# Altium PCB main1.PcbDoc
Units mm, origin at the board's own origin, x right, y up, seen from the top; angles counter-clockwise.
Board outline 133.25 x 160.58 mm, 2 copper layers (Top Layer, Bottom Layer); 75 components, 60 nets, 284 pads, 231 vias.
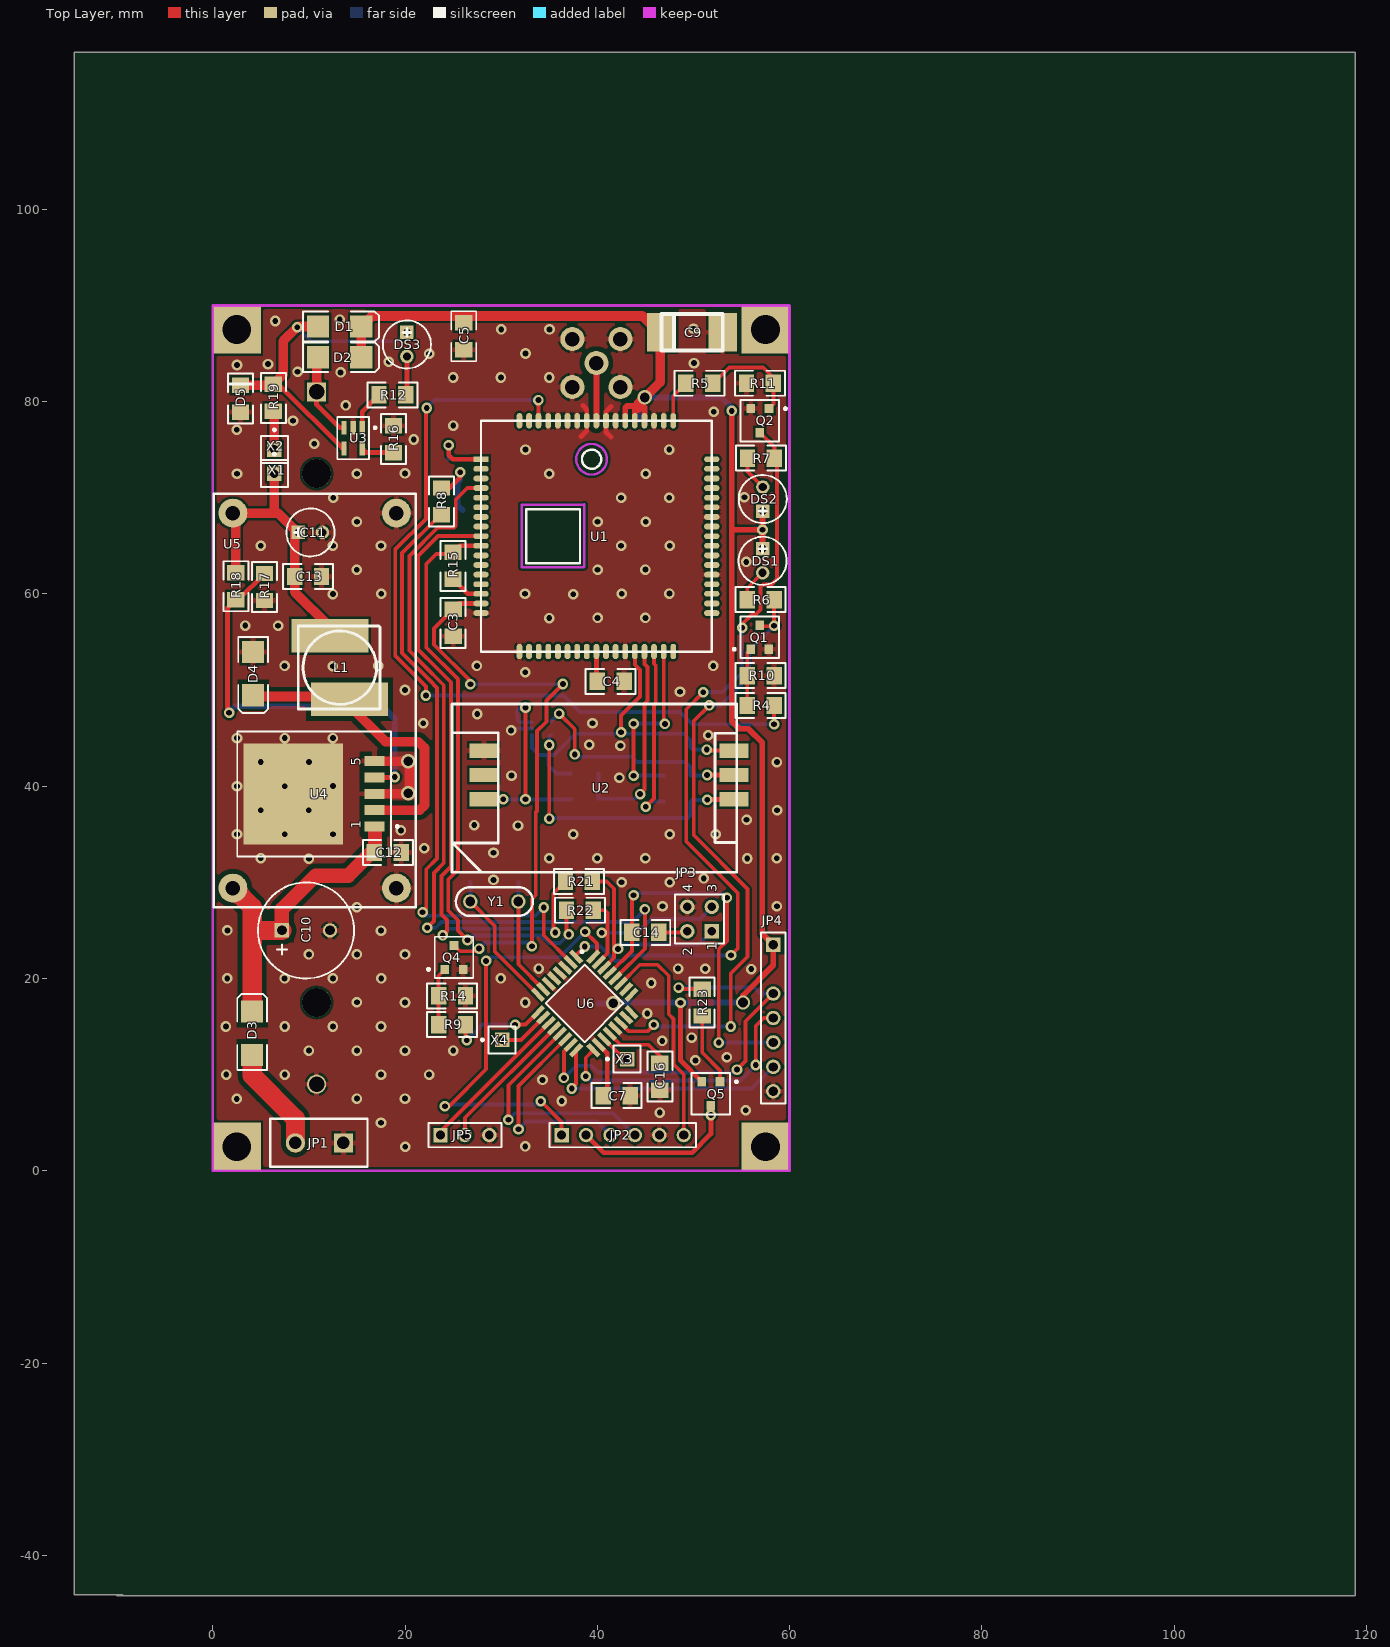
[diagram p0: Top Layer view]
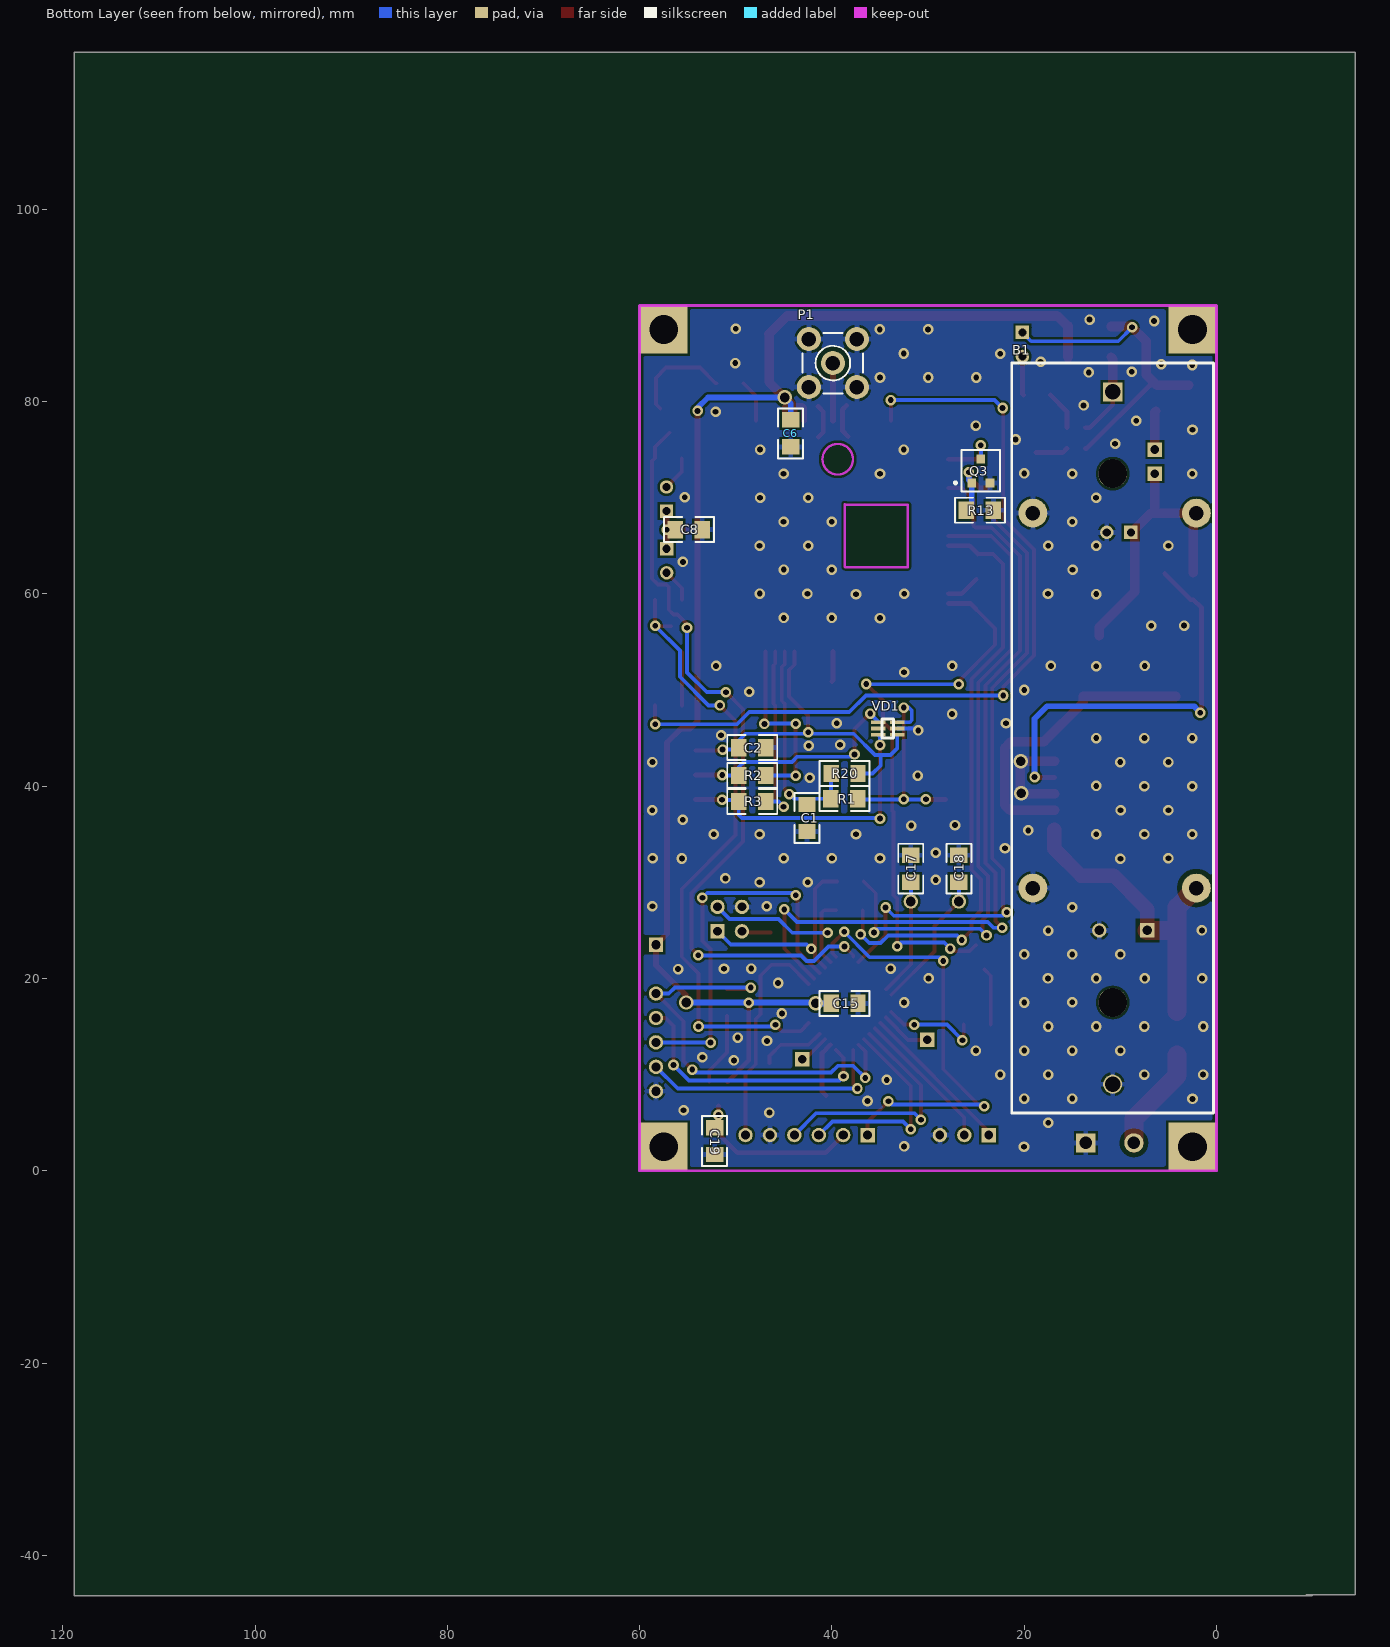
[diagram p1: Bottom Layer view, seen from below]

## Layer stack, top to bottom
Top Layer: signal copper 0.0356
Dielectric: dielectric 0.32, FR-4, Dk 4.8
Bottom Layer: signal copper 0.0356

## Board outline
-9.975,-44.225 118.825,-44.225 118.825,116.35 -14.425,116.35 -14.425,-44.1 -9.35,-44.1

## Design rules (kind name [scope] priority, off if disabled: settings)
Clearance Clearance_3 [InPoly vs InNet('NetD3_1') or
InNet('NetC10_1') or
InNet('NetD4_2')] p1: gap=0.5
Clearance Clearance_2 [InComponent(U4) vs InPoly] p2: gap=0.5
Clearance [InNet('NetP1_1') vs InPoly] p3: gap=0.5
Clearance Clearance_1 [All] p4: gap=0.25
ComponentClearance [All] p1: gap=0.254 collisioncheckmode=0
HoleSize [All] p1: absolutevalues=TRUE maxlimit=4 minlimit=0.025 maxpercent=80.000 minpercent=20.000
PolygonConnect PolygonConnect_1 [HasPad('U4-6')] p1: connectstyle=Direct reliefconductorwidth=0.254 reliefentries=4 polygonreliefangle="90 Angle"
PolygonConnect [All] p2: connectstyle=Relief reliefconductorwidth=0.5 reliefentries=4 polygonreliefangle="90 Angle"
RoutingLayers [All] p1: top layer=Horizontal bottom layer=Vertical
RoutingVias [All] p1: holewidth=0.6 width=1.1 viastyle="Through Hole" minholewidth=0.5 minwidth=1 maxholewidth=1 maxwidth=1.5
SolderMaskExpansion [All] p1: expansion=0.102
TestPointUsage [All] p1: valid=0 allowmultiple=FALSE
Testpoint [All] p1: side=15 testpointundercomponent=TRUE minsize=1.016 maxsize=2.54 preferedsize=1.524 minholesize=0 maxholesize=1.016 preferedholesize=0.813 testpointgrid=0.025 style=1023 order=-539222988
Width [All] p1: maxlimit=3 minlimit=0.2 preferedwidth=0.254 toplayer_prefwidth=0.5 bottomlayer_prefwidth=0.4 minimp=50.000000 maximp=50.000000 favimp=50.000000
15 further rules are at their usual default settings.

## Components (designator, comment, footprint, x,y, rotation, side; value= is the part's Value field where it differs from the comment)
B1 "BAT18650_HOLDER" BAT18650_HOLDER 10.8,45 r270 bottom
C1 "22" _1206 42.6,36.7 r90 bottom
C2 "0.1" _1206 48.3,44 r0 bottom
C3 "0.1" _1206 25,57 r90 top
C4 "10,0" _1206 41.4,50.9 r0 top
C5 "1.0" _1206 26.1,86.8 r90 top
C6 "1.0" _1206 44.3,76.7 r90 bottom
C7 "1.0" _1206 42,7.8 r180 top
C8 "1.0" _1206 54.9,66.675 r0 bottom
C9 "10.0x25 tantal" CAP_EL_6_3 46.7,87.2 r0 top
C10 "" el5 12.2,25 r180 top
C11 "" el3 8.9,66.4 r0 top
C12 "Cap" _1206 18.2,33.1 r180 top
C13 "Cap" _1206 9.9,61.8 r180 top
C14 "0.1" _1206 45,24.8 r0 top
C15 "1.0" _1206 38.7,17.4 r0 bottom
C16 "1.0" _1206 46.5,9.8 r90 top
C17 "10" _1206 31.8,31.4 r270 bottom
C18 "10" _1206 26.8,31.4 r270 bottom
C19 "1.0" _1206 52.2,3.1 r90 bottom
D1 "10BQ100" DSO-C2/X2.3 13.2,87.8 r0 top
D2 "10BQ100" DSO-C2/X2.3 13.2,84.6 r0 top
D3 "10BQ100" DSO-C2/X2.3 4.1,14.3 r90 top
D4 "10BQ100" DSO-C2/X2.3 4.2,51.7 r270 top
D5 "D Zener" _1206d 2.9,80.3 r270 top
DS1 "LED0" el3 57.2,64.7 r270 top
DS2 "LED0" el3 57.2,68.6 r90 top
DS3 "LED0" el3 20.2,87.2 r270 top
JP1 "Header 2" BT5-2 13.6,2.9 r180 top
JP2 "GPSCONN" HDR1X6 36.3,3.719 r0 top
JP3 "Header 2X2" HDR2X2 51.9,24.9 r90 top
JP4 "AVR_conn" AVR_CONN 58.3,23.5 r270 top
JP5 "TOMAINCONN" HDR1X3 23.7,3.7 r0 top
L1 "SDR0805-390KL" L10x10 18.3,57.4 r180 top
P1 "SMB" SMB_V-RJ45 39.9,84 r180 bottom
Q1 "BC847" SO-G3/C2.5 56.9,55.5 r0 top
Q2 "BC847" SO-G3/C2.5 56.9,78 r180 top
Q3 "BC847" SO-G3/C2.5 24.5,72.8 r180 bottom
Q4 "BC847" SO-G3/C2.5 25.1,22.2 r0 top
Q5 "BC807" SO-G3/C2.5 51.8,8 r180 top (schematic designator Q?)
R1 "22R" _1206 38.7,38.7 r180 bottom
R2 "22R" _1206 48.3,41.1 r0 bottom
R3 "22R" _1206 48.3,38.4 r0 bottom
R4 "4K7" _1206 57,48.4 r0 top
R5 "4K7" _1206 50.6,81.9 r180 top
R6 "300" _1206 57,59.4 r0 top
R7 "300" _1206 57,74.1 r180 top
R8 "4K7" _1206 23.8,69.6 r270 top
R9 "4K7" _1206 24.9,15.2 r0 top
R10 "33K" _1206 57,51.5 r0 top
R11 "33K" _1206 56.9,81.9 r180 top
R12 "300" _1206 18.7,80.7 r0 top
R13 "33K" _1206 24.6,68.7 r180 bottom
R14 "33K" _1206 24.9,18.2 r0 top
R15 "10K" _1206 25,62.9 r270 top
R16 "2K0" _1206 18.8,76.1 r90 top
R17 "*" _1206 5.4,60.7 r270 top
R18 "*" _1206 2.4,60.8 r90 top
R19 "1R" _1206 6.3,80.4 r90 top
R20 "4K7" _1206 38.7,41.3 r0 bottom
R21 "1K0" _1206 38.1,30.1 r0 top
R22 "1K0" _1206 38.2,27.1 r0 top
R23 "Res2" _1206 50.9,17.5 r90 top (schematic designator R?)
U1 "SIM900" SIM900F 39.9,66 r0 top
U2 "SIM_HOLDER" SIM_HOLDER_1 39.7,39.8 r270 top
U3 "LTC4054" SO-G5/P.95 14.6,76.2 r180 top
U4 "LM2596S-ADJ" SIP-G5/Y2.1 12.6,39.2 r90 top
U5 "LM2596_MODULE" LM2596_MODULE_1 10.6,48.9 r90 top
U6 "ATmega8" QFP7X7-G32/X.5N 38.7,17.4 r315 top
VD1 "*" sot363 34.2,46 r90 bottom
X1 "Socket" PIN1 6.4,72.5 r0 top
X2 "Socket" PIN1 6.4,75 r0 top
X3 "Socket" PIN1 43.1,11.6 r90 top
X4 "Socket" PIN1 30.1,13.6 r90 top
Y1 "16MGz" qwarz1 31.8,28 r180 top

## Footprints (in the part's own frame and the unit in brackets; to place one, negate y for a bottom-side part, rotate by r counter-clockwise, add the part's x,y. Pads: shape width x height; smd on the part's side, far side on the other; paste and mask are expansions set on the pad)
_1206 [mm]
  rect 1.6x1.8 smd: 1(-1.412,-0.007) 2(1.388,-0.007)
  silkscreen extent -2.61,-1.31 2.59,1.29
_1206d [mm]
  rect 1.6x1.8 smd: 1(1.395,-0.009) 2(-1.405,-0.009)
  silkscreen extent -2.6,-1.31 2.6,1.29
AVR_CONN [mm]
  rect 1.5x1.5 hole 0.95: 1(-0.007,-0.001)
  round 1.5 hole 0.95: 3(5.073,-0.001) 4(7.613,-0.001) 5(10.153,-0.001) 6(12.693,-0.001) 7(15.233,-0.001)
  silkscreen extent -1.28,-1.27 16.5,1.27
BAT18650_HOLDER [mm]
  round 3 hole 3: 0(-27.5,0) 0(27.5,0)
  rect 2x2 hole 1.6: 1(-36,0)
  round 2 hole 1.6: 2(36,0)
  silkscreen extent -39,-10.5 39,10.5
BT5-2 [mm]
  rect 2x2 hole 1.3: 1(0.006,0.008)
  round 2 hole 1.3: 2(5.006,0.008)
  silkscreen extent -2.49,-2.49 7.61,2.51
CAP_EL_6_3 [mm]
  rect 3x4 smd: 1(-0.011,0.006) 2(6.339,0.006)
  silkscreen extent -0.01,-1.9 6.34,1.91
DSO-C2/X2.3 [mm]
  rect 2.3x2.3 smd: 1(-2.252,0.001) 2(2.248,0.001)
  silkscreen extent -3.8,-1.55 4.1,1.55
el3 [mm]
  rect 1.4x1.4 hole 0.85: 1(0.011,-0.008)
  round 1.4 hole 0.85: 2(2.511,-0.008)
  silkscreen extent -1.23,-2.51 3.76,2.49
el5 [mm]
  rect 1.5x1.5 hole 1: 1(5.001,0.007)
  round 1.5 hole 1: 2(0.001,0.007)
  silkscreen extent -2.5,-4.99 7.5,5.01
HDR1X3 [mm]
  rect 1.5x1.5 hole 0.9: 1(-0.009,0.011)
  round 1.5 hole 0.9: 2(2.531,0.011) 3(5.071,0.011)
  silkscreen extent -1.28,-1.26 6.34,1.28
HDR1X6 [mm]
  rect 1.5x1.5 hole 0.95: 1(-0.012,-0.008)
  round 1.5 hole 0.95: 2(2.528,-0.008) 3(5.068,-0.008) 4(7.608,-0.008) 5(10.148,-0.008) 6(12.688,-0.008)
  silkscreen extent -1.28,-1.28 13.96,1.26
HDR2X2 [mm]
  rect 1.5x1.5 hole 0.9: 1(0,0)
  round 1.5 hole 0.9: 2(0,2.54) 3(2.54,0) 4(2.54,2.54)
  silkscreen extent -1.27,-1.27 3.81,3.81
L10x10 [mm]
  rect 8x3.5 smd: 1(4.075,8.372) 2(6.107,1.768)
  silkscreen extent 0.9,0.75 9.41,9.39
LM2596_MODULE_1 [mm]
  round 3 hole 1.5: 1(-19.5,8.5) 2(-19.5,-8.5) 3(19.5,-8.5) 4(19.5,8.5)
  silkscreen extent -21.5,-10.5 21.5,10.5
PIN1 [mm]
  rect 1.5x1.5 hole 0.9: 1(0.012,0.005)
  silkscreen extent -1.39,-1.4 1.41,2.18
QFP7X7-G32/X.5N [mm]
  rect 1.65x0.5 smd: 1(-4.082,2.794) 2(-4.082,1.994) 3(-4.082,1.194) 4(-4.082,0.394) 5(-4.082,-0.406) 6(-4.082,-1.206) 7(-4.082,-2.006) 8(-4.082,-2.806) 17(4.068,-2.806) 18(4.068,-2.006) 19(4.068,-1.206) 20(4.068,-0.406) 21(4.068,0.394) 22(4.068,1.194) 23(4.068,1.994) 24(4.068,2.794)
  rect 0.5x1.65 smd: 9(-2.807,-4.081) 10(-2.007,-4.081) 11(-1.207,-4.081) 12(-0.407,-4.081) 13(0.393,-4.081) 14(1.193,-4.081) 15(1.993,-4.081) 16(2.793,-4.081) 25(2.793,4.069) 26(1.993,4.069) 27(1.193,4.069) 28(0.393,4.069) 29(-0.407,4.069) 30(-1.207,4.069) 31(-2.007,4.069) 32(-2.807,4.069)
  silkscreen extent -4.13,-2.86 2.84,3.72
qwarz1 [mm]
  round 1.5 hole 1: 1(0.008,0) 2(5.008,0)
  silkscreen extent -1.49,-1.5 6.51,1.5
SIM900F [mm]
  rect 1.6x0.6 smd: 1(-12,8)
  oval 1.6x0.6 smd: 2(-12,7) 3(-12,6) 4(-12,5) 5(-12,4) 6(-12,3) 7(-12,2) 8(-12,1) 9(-12,0) 10(-12,-1) 11(-12,-2) 12(-12,-3) 13(-12,-4) 14(-12,-5) 15(-12,-6) 16(-12,-7) 17(-12,-8) 35(12,-8) 36(12,-7) 37(12,-6) 38(12,-5) 39(12,-4) 40(12,-3) 41(12,-2) 42(12,-1) 43(12,0) 44(12,1) 45(12,2) 46(12,3) 47(12,4) 48(12,5) 49(12,6) 50(12,7) 51(12,8)
  oval 0.6x1.6 smd: 18(-8,-12) 19(-7,-12) 20(-6,-12) 21(-5,-12) 22(-4,-12) 23(-3,-12) 24(-2,-12) 25(-1,-12) 26(0,-12) 27(1,-12) 28(2,-12) 29(3,-12) 30(4,-12) 31(5,-12) 32(6,-12) 33(7,-12) 34(8,-12) 52(8,12) 53(7,12) 54(6,12) 55(5,12) 56(4,12) 57(3,12) 58(2,12) 59(1,12) 60(0,12) 61(-1,12) 62(-2,12) 63(-3,12) 64(-4,12) 65(-5,12) 66(-6.025,12) 67(-7,12) 68(-8,12)
  silkscreen extent -12,-12 12,12
SIM_HOLDER_1 [mm]
  rect 1.5x3 smd: 2(1.18,14.5) 3(-1.36,14.5) 4(-3.9,14.5) 5(-3.9,-11.5) 6(-1.36,-11.5) 7(1.18,-11.5)
  silkscreen extent -8.75,-14.8 8.75,14.8
SIP-G5/Y2.1 [mm]
  rect 1.05x2.1 smd: 1(-3.4,-4.225) 2(-1.7,-4.225) 3(0,-4.225) 4(1.7,-4.225) 5(3.4,-4.225)
  rect 10.5x10.3 smd: 6(-0.01,4.225)
  silkscreen extent -6.52,-6.73 6.48,10.05
SMB_V-RJ45 [mm]
  round 2.5 hole 1.5: 1(0,0) 2(-2.5,-2.5) 2(-2.5,2.5) 2(2.5,-2.5) 2(2.5,2.5)
  silkscreen extent -3.15,-3.15 3.15,3.15
SO-G3/C2.5 [mm]
  rect 0.9x0.95 smd: 1(-0.958,-1.261) 2(0.942,-1.261) 3(-0.008,1.239)
  silkscreen extent -2.78,-2.16 1.99,2.14
SO-G5/P.95 [mm]
  rect 0.55x1.45 smd: 1(-0.95,-1.075) 2(0,-1.075) 3(0.95,-1.075) 4(0.95,1.075) 5(-0.95,1.075)
  silkscreen extent -2.43,-2.2 1.65,2.2
sot363 [mm]
  rect 0.4x1.5 smd: 1(-0.65,-1) 2(0,-1) 3(0.65,-1) 4(0.65,1) 5(0,1) 6(-0.65,1)
  silkscreen extent -1,-0.6 1,0.6

## Part data
C1 C2 C3 C4 C5 C6 C7 C8 C14 C15 C16 C17 C18 C19: library part "Cap Semi", "Capacitor"
C9: library part "Cap Pol1", "Polarized Capacitor (Radial)"
C10 C11: library part "Cap Pol", "Polarized Capacitor (Radial)"
C12 C13: "Capacitor"
D1 D2 D3 D4: library part 10BQ015, "Schottky Rectifier"
D5: "Zener Diode"
DS1 DS2 DS3: "Typical INFRARED GaAs LED"
JP1: "Header, 2-Pin"
JP2: library part "Header 6", "Header, 6-Pin"
JP3: "Header, 2-Pin, Dual row"
JP4: "Header, 7-Pin"
JP5: library part "Header 3", "Header, 3-Pin"
L1: library part "Inductor Konstr 2", "Magnetic-Core Inductor"
P1: "SMB Straight Connector"
Q1 Q2 Q3 Q4: library part BC847ALT1, "General Purpose Transistor NPN Silicon"
Q5: library part BC857ALT1, "General Purpose Transistor PNP Silicon"
R1 R2 R3 R4 R5 R6 R7 R8 R9 R10 R11 R12 R13 R14 R15 R16 R17 R18 R19 R20 R21 R22: library part Res2, "Resistor"
R23: "Resistor"
U4: "Simple Switcher Power Converter 150 kHz 3A Step Down Voltage Regulator"
U6: library part ATmega48/TQFP
VD1: library part SMF05C
Y1: library part XTAL, "Crystal Oscillator"

## Free pads (board coordinates)
  rect 5x5 hole 3: 0(2.5,87.5) 2(2.5,2.5) 3(57.5,2.5) 4(57.5,87.5)

## Via types
v1: diameter 1.1, hole 0.6, Top Layer to Bottom Layer, 226 vias
v2: diameter 1.5, hole 1, Top Layer to Bottom Layer, 5 vias

## Nets (pads, with @x,y where several pads share a name; then routed paths per layer and width w, separated by ;. In a path a pad name is that pad's centre, name@x,y a point inside that pad or via, vN(x,y) a via of type N, cw(c..) or ccw(c..) an arc to the next point about the centre after c; other vN are vias at no path point)
+5V: D1.1 D5.2 DS3.1 R19.2 U3.4 | length 35.1
  Top Layer w0.5: R19.2@6.224,81.705 6.92,81.705 13.5,75.125 U3.4
  Top Layer w1: D5.2 6.224,81.705 7.325,82.806 7.325,86.275 8.775,87.725 8.851,87.801 D1.1
  Bottom Layer w0.4: v1(8.784,87.716) 10.225,86.275 19.278,86.275 DS3.1
ADC6: U6.19 X3.1 | length 3.2
  Top Layer w0.4: U6.19 42.783,11.612 X3.1
GND: B1.2 C1.1 C2.1 C3.1 C4.2 C5.1 C6.1 C7.1 C8.1 C9.2 C10.2 C11.2 C12.1 C13.1 C15.1 C16.1 C17.1 C18.1 C19.1 D4.1 D5.1 JP1.1 JP2.5 JP3.4 JP4.7 JP5.3 P1.2 Q1.2 Q2.2 Q3.2 Q4.2 R10.2 R11.2 R13.2 R14.2 R16.2 R17.2 U1.17 U1.18 U1.29 U1.39 U1.45 U1.46 U1.53 U1.54 U1.58 U1.59 U1.61 U1.62 U1.63 U1.64 U1.65 U2.5 U3.2 U4.3 U4.5 U4.6 U5.2 U5.3 U6.3 U6.5 U6.21 VD1.2 | length 19.8
  Top Layer w0.5: 38.3,76.35 38.9,76.95 38.9,79.175 38.475,79.6 ; 41.425,76.3 40.9,76.825 40.9,78.95 41.45,79.5
  Top Layer w1: U4.3 20.375,39.2 20.425,39.25 v2@20.425,42.575 ; U4.5 v2@20.35,42.6 ; v2(20.35,42.575) v2@20.425,42.65
  Bottom Layer w0.4: v1@31.3,45.975 31.325,46 VD1.2
  other v1: 20.025,2.5 32.5,2.525 17.5,5 46.5,6.05 55.425,6.3 36.3,7.25 2.5,7.475 15,7.5 20,7.5 34.3,9.45 1.4,10 7.5,10 17.5,10 22.5,10 50.2,11.475 53.475,11.8 10,12.5 15,12.5 20,12.5 25.025,12.5 46.75,13.5 49.8,13.85 1.375,15 7.5,15 12.5,15 17.5,15 45.2,16.35 20,17.5 32.5,17.5 15,17.525 45.6,19.525 1.5,20 7.475,20 12.5,20 17.525,20 29.95,20 56,20.975 51.225,21 33.9,21.025 48.4,21.025 10,22.5 15,22.5 20,22.5 17.5,24.975 1.525,25 15,27.4 46.775,27.5 58.675,27.5 42.525,30 47.525,30 29.2,30.25 51.075,30.4 10,32.45 55.6,32.475 5,32.5 35,32.5 40,32.5 45,32.5 58.65,32.5 29.2,33.075 22,33.55 2.525,35 7.5,35 12.5,35 37.5,35 47.525,35 52.3,35 19.575,35.4 31.75,35.9 27.2,35.95 55.525,36.5 5,37.5 9.975,37.5 58.7,37.5 2.525,40 7.5,40 12.5,40.025 42.3,40.875 31.075,41.1 5,42.5 10.025,42.5 58.675,42.5 42.4,44.2 39.15,44.3 2.525,45 7.5,45 12.5,45 51.525,45.3 31.025,45.8 21.9,46.55 39.5,46.55 27.5,47.5 48.6,49.825 20,50 32.5,51.85 12.5,52.475 7.475,52.5 17.225,52.5 27.475,52.5 52.05,52.5 6.8,56.675 3.375,56.7 35,57.475 40.025,57.5 45,57.5 37.5,59.95 12.5,59.975 17.525,60 32.475,60 42.55,60 47.5,60.025 14.975,62.5 40.025,62.5 45,62.525 55.5,63.325 5,65 12.5,65 17.5,65 42.475,65 47.525,65 15,67.5 40.025,67.5 45.025,67.5 12.525,70 42.475,70 47.475,70 55.3,70.05 2.525,72.5 15,72.5 35,72.5 45.025,72.5 20,72.525 32.525,75 47.475,75 10.55,75.6 20.9,76.05 2.5,77.075 25.025,77.5 8.35,78 52.1,78.95 13.825,79.6 25,82.5 29.975,82.5 35,82.5 13.3,83.025 8.825,83.1 2.525,83.8 5.75,83.9 50.05,84 18.3,84.15 22.5,84.975 32.525,85 30,87.5 35.025,87.5 35.025,87.5 50,87.575 6.5,88.375 13.2,88.525
  other v2: 20.325,39.25
GPSEN: JP2.6 U6.27 | length 23.5
  Top Layer w0.4: U6.27 44.412,21.425 46.275,21.425 47.425,20.275 47.425,16.275 47.925,15.775 47.925,11.075 48.988,10.012 JP2.6
GPSPPS: JP2.1 U6.32 | length 46.6
  Top Layer w0.4: v1(24.15,6.7) 24.575,6.7 28.425,10.55 v1(28.425,21.825) ; v1(34.125,7.225) 36.288,5.062 JP2.1 ; v1(38.725,24.85) 39.95,23.625 39.95,22.62 U6.32
  Bottom Layer w0.4: v1(24.15,6.7) 24.325,6.875 33.825,6.875 33.825,6.925 v1(34.125,7.225) ; v1(28.425,21.825) 28.8,22.2 36.075,22.2 v1(38.725,24.85)
GPSRX: JP2.4 U6.13 | length 25.5
  Top Layer w0.4: v1(30.75,5.3) 30.75,8.895 U6.13
  Bottom Layer w0.4: v1(30.75,5.3) 31.425,5.975 41.644,5.975 JP2.4
GPSTX: JP2.3 U6.14 | length 21.8
  Top Layer w0.4: v1(31.8,4.325) 31.8,8.813 U6.14
  Bottom Layer w0.4: v1(31.8,4.325) 32.6,5.125 39.954,5.125 JP2.3
GPSVCC: C19.2 JP2.2 Q5.3 | length 17.5
  Top Layer w0.5: JP2.2 40.664,1.875 49.85,1.875 51.808,3.833 Q5.3
  other v1: 51.808,5.8
NetB1_1: B1.1 D2.1 U3.3 | length 8.8
  Top Layer w0.5: B1.1 10.8,79.675 13.2,77.275 U3.3
  Top Layer w1: B1.1 10.8,84.453 D2.1
NetC1_2: C1.2 R1.1 R20.2 U1.31 | length 22.4
  Top Layer w0.4: v1(44.45,39.175) 44.9,39.625 44.9,48.55 45.225,48.875 45.225,52.375 44.9,52.7 U1.31
  Bottom Layer w0.4: R20.2 40.112,41.282 R1.1 43.968,38.693 v1(44.45,39.175)
NetC2_2: C2.2 R20.1 U1.30 U2.4 VD1.1 | length 38.2
  Top Layer w0.4: v1(42.475,45.6) 42.475,47.35 44.45,49.325 44.45,52.075 43.9,52.625 U1.30 ; v1(51.375,43.8) 51.475,43.7 U2.4
  Bottom Layer w0.4: VD1.1 33.2,43.975 33.925,43.25 35.525,43.25 37.725,45.45 48.975,45.45 49.688,44.737 C2.2 49.894,43.8 v1(51.375,43.8) ; 34.925,43.25 34.925,42.15 35.768,41.307 R20.1 ; v1(42.475,45.6) v1@42.625,45.45
NetC3_2: C3.2 Q4.3 U1.16 | length 60.7
  Top Layer w0.4: C3.2@24.994,58.375 23.025,56.406 23.025,54.7 26.8,50.925 v1(26.8,50.6) ; Q4.3@25,23.45 25.08,23.45 25.705,22.825 27.425,22.825 v1(27.7,23.1) ; v1@33.175,23.325 v1(33.2,23.35) 33.2,28.25 33.6,28.65 33.6,37.3 33.725,37.425 33.725,45.725 34.7,46.7 34.7,48.9 v1(36.425,50.625)
  Top Layer w0.5: C3.2@24.994,58.375 25.619,59 U1.16
  Bottom Layer w0.4: v1(26.8,50.6) v1@36.45,50.6 ; v1(27.7,23.1) 28.325,23.725 32.825,23.725 v1(33.2,23.35) ; v1(36.425,50.625) v1@36.475,50.575
NetC4_1: C4.1 U1.26 | length 3.1
  Top Layer w0.5: U1.26 39.9,50.981 C4.1
NetC10_1: C10.1 C12.2 D3.2 U4.1 U5.1 | length 33.3
  Top Layer w1.5: C10.1 7.199,27.199 10.7,30.7 14.1,30.7 16.875,33.475 U4.1@16.875,35.475
  Top Layer w2: U5.1 4.099,27.401 D3.2 ; 4.099,24.85 4.241,24.993 C10.1
NetC11_1: C11.1 C13.2 L1.2 R18.2 U5.4 X1.1 | length 30.2
  Top Layer w1: R18.2 2.407,68.093 U5.4 6.8,68.4 8.512,66.688 C13.2 8.512,60.213 12.193,56.532 L1.2 ; 6.2,68.4 6.412,68.612 X1.1
NetC14_2: C14.2 JP3.2 | length 3
  Top Layer w0.4: C14.2 49.253,24.793 JP3.2
NetC16_2: C16.2 U6.20 | length 6.9
  Top Layer w0.4: U6.20 42.426,13.1 45.325,13.1 46.507,11.918 C16.2
NetC17_2: C17.2 U6.7 Y1.1 | length 12.2
  Top Layer w0.4: Y1.1 31.792,21.471 U6.7
  Bottom Layer w0.4: Y1.1 31.792,29.998 C17.2
NetC18_2: C18.2 U6.8 Y1.2 | length 14.6
  Top Layer w0.4: Y1.2 29.325,25.467 29.325,22.806 U6.8
  Bottom Layer w0.4: Y1.2 26.792,29.998 C18.2
NetD3_1: D3.1 JP1.2 | length 11
  Top Layer w2: D3.1 4.099,9.901 8.594,5.406 JP1.2
NetD4_2: D4.2 L1.1 U4.2 | length 31.7
  Top Layer w1: D4.2@4.25,49.325 13.85,49.325 13.85,48.725 17.95,44.625 21.375,44.625 22.025,43.975 22.025,38 21.525,37.5 U4.2
NetDS1_2: DS1.2 R6.1 | length 3.5
  Top Layer w0.4: R6.1 55.588,60.584 DS1.2
NetDS2_2: DS2.2 R7.2 | length 3.7
  Top Layer w0.4: R7.2 55.612,72.707 DS2.2
NetDS3_2: DS3.2 R12.2 | length 4
  Top Layer w0.5: R12.2 20.192,80.798 DS3.2
NetP1_1: P1.1 U1.60 | length 6
  Top Layer w0.6: U1.60 P1.1
NetQ1_1: Q1.1 R4.1 R10.1 | length 6
  Top Layer w0.4: R4.1 55.588,53.885 Q1.1
NetQ2_1: Q2.1 R5.1 R11.1 | length 10.8
  Top Layer w0.4: R5.1 52.107,81.907 53.725,83.525 57.25,83.525 58.312,82.463 R11.1 58.312,79.715 Q2.1
NetQ3_1: Q3.1 R8.1 R13.1 | length 7.2
  Top Layer w0.5: R8.1 24.637,71.012 25.75,72.125 v1(25.75,72.65)
  Bottom Layer w0.6: v1(25.75,72.65) 25.75,71.83 Q3.1 25.458,69.247 R13.1
NetQ3_3: Q3.3 U1.1 | length 6
  Top Layer w0.5: v1(24.525,75.45) 24.55,75.45 24.55,74.425 24.975,74 U1.1
  Bottom Layer w0.4: Q3.3 24.508,75.433 v1(24.525,75.45)
NetQ4_1: Q4.1 R9.1 R14.1 | length 6
  Top Layer w0.4: R9.1 23.488,20.285 Q4.1
NetQ5_1: Q5.1 R23.1 | length 7.6
  Top Layer w0.4: R23.1 50.907,12.293 52.758,10.442 Q5.1
NetR1_2: R1.2 U2.7 VD1.3 | length 22.3
  Top Layer w0.4: v1@32.525,38.6 v1(32.525,48.175)
  Top Layer w0.5: U2.7 30.22,38.62 v1(30.225,38.625) ; v1@32.525,38.6 v1(32.525,38.625)
  Bottom Layer w0.4: v1(30.225,38.625) 37.244,38.625 R1.2 ; v1(32.525,48.175) 32.025,48.175 31.7,47.85 31.7,46.85 31.9,46.65 VD1.3
NetR2_1: R2.1 U1.33 | length 19.2
  Top Layer w0.4: v1(43.775,41.075) v1(43.775,46.5) ; v1@46.9,46.5 U1.33
  Bottom Layer w0.4: v1(43.775,41.075) 43.807,41.107 R2.1 ; v1(43.775,46.5) v1@46.9,46.5
  other v1: 47.025,46.475
NetR2_2: R2.2 U2.3 VD1.4 | length 24.3
  Top Layer w0.4: v1@36,47.525 v1(36.025,47.55) 37.65,45.925 v1(37.65,43.3) v1@37.575,43.3
  Top Layer w0.5: v1(51.41,41.16) U2.3
  Bottom Layer w0.4: VD1.4 35.2,46.725 v1(36.025,47.55) ; v1(37.65,43.3) 37.9,43.05 43.625,43.05 44.15,42.525 49.15,42.525 49.688,41.987 R2.2 51.357,41.107 v1(51.41,41.16)
NetR3_1: R3.1 U1.32 | length 18.9
  Top Layer w0.4: v1(45.025,37.85) 45.9,38.725 45.9,48.4 46.075,48.575 46.075,52.55 45.9,52.725 U1.32
  Bottom Layer w0.4: v1(45.025,37.85) 44.975,37.85 45.532,38.407 R3.1
NetR3_2: R3.2 U2.2 VD1.6 | length 29.7
  Top Layer w0.4: v1(35,36.625) v1(35,44.275)
  Top Layer w0.5: v1(51.425,38.575) 51.47,38.62 U2.2
  Bottom Layer w0.4: v1(35,36.625) 35.075,36.7 49.375,36.7 49.688,37.013 R3.2 49.856,38.575 v1(51.425,38.575) ; v1(35,44.275) 35,45.15 VD1.6
NetR4_2: R4.2 U1.66 | length 86.1
  Top Layer w0.4: v1(22.175,49.425) 22.175,50.375 18.975,53.575 18.975,64.6 22.175,67.8 22.175,79.25 v1(22.25,79.325) ; U1.66 v1(33.875,80.15) ; v1(58.388,46.437) R4.2
  Bottom Layer w0.4: v1(22.175,49.425) 36.475,49.425 38.2,47.7 48.6,47.7 49.863,46.437 v1(58.388,46.437) ; v1(22.25,79.325) 23.075,80.15 v1(33.875,80.15)
NetR5_2: R5.2 U1.52 | length 4.5
  Top Layer w0.4: U1.52 47.9,80.594 R5.2
NetR12_1: R12.1 U3.1 | length 4.1
  Top Layer w0.5: U3.1 15.55,78.956 R12.1
NetR16_1: R16.1 U3.5 | length 3.4
  Top Layer w0.5: U3.5 15.987,74.688 R16.1
NetR17_1: R17.1 R18.1 U4.4 | length 42.8
  Top Layer w0.5: v1(1.7,47.625) 1.55,47.55 1.55,58.531 R18.1 2.669,59.388 R17.1 ; U4.4 18.975,40.9 v1(18.925,40.95)
  Bottom Layer w0.6: v1(1.7,47.625) 2.3,48.3 17.625,48.3 18.925,47 v1(18.925,40.95)
NetR19_1: R19.1 X2.1 | length 4
  Top Layer w1: R19.1 6.412,78.883 X2.1
NETSTAT: Q2.3 R7.1 U6.1 | length 80.9
  Top Layer w0.4: U6.1 37.789,22.414 v1(38.7,23.325) ; v1(51.025,49.775) 49.25,48 49.25,34.25 54.6,28.9 54.6,23.1 v1(53.9,22.4) ; v1(55.075,56.475) 55.075,56.85 56.075,57.85 56.475,57.85 56.975,58.35 56.975,60.7 57.25,60.975 58.1,60.975 58.7,61.575 58.7,73.819 R7.1 58.412,75.257 Q2.3
  Bottom Layer w0.4: v1(38.7,23.325) 40.35,23.325 41.85,21.825 42.65,21.825 43.225,22.4 v1(53.9,22.4) ; v1(51.025,49.775) 53.025,49.775 55.075,51.825 v1(55.075,56.475)
PB0: JP5.2 U6.12 | length 14.9
  Top Layer w0.4: JP5.2 26.231,5.507 U6.12
PB3: JP4.3 R23.2 U6.15 | length 44.8
  Top Layer w0.4: v1(36.525,9.65) 36.525,12.407 U6.15 ; v1(48.45,19.05) 48.612,18.888 R23.2 ; v1(54.525,10.525) 55.425,11.425 55.425,15.553 JP4.3
  Bottom Layer w0.4: v1(36.525,9.65) 37.8,10.925 39.375,10.925 40.1,10.2 54.2,10.2 v1(54.525,10.525) ; v1(48.45,19.05) 48.45,19.075 56.325,19.075 56.973,18.427 JP4.3
PB4: JP4.6 U6.16 | length 26.1
  Top Layer w0.4: v1(37.35,8.55) 37.789,8.989 U6.16
  Bottom Layer w0.4: v1(37.35,8.55) 56.042,8.55 JP4.6
PB5: JP4.4 U6.17 | length 27.8
  Top Layer w0.4: v1(38.8,9.825) 38.8,11.747 U6.17 ; v1(56.475,11) 56.475,15.05 57.312,15.887 JP4.4
  Bottom Layer w0.4: v1(38.8,9.825) 39.225,9.4 54.875,9.4 v1(56.475,11)
PC6: C14.1 JP4.5 U6.29 | length 40.2
  Top Layer w0.4: U6.29 43.588,22.863 43.588,28.463 v1(43.775,28.65) ; v1(52.625,13.325) 52.625,23.05 53.475,23.9 v1(53.475,28.4)
  Bottom Layer w0.4: v1(43.775,28.65) 44.025,28.9 52.975,28.9 v1(53.475,28.4) ; v1(52.625,13.325) 52.647,13.347 JP4.5
PD0: JP3.1 R21.2 U6.30 | length 21.7
  Top Layer w0.4: R21.2 40.982,30.093 41.75,29.325 41.75,22.157 U6.30
  Bottom Layer w0.4: v1(42.15,23.075) 42.175,23.075 42.625,23.525 50.525,23.525 JP3.1
PD1: JP3.3 R22.2 U6.31 | length 20.3
  Top Layer w0.4: R22.2 40.807,27.093 41.075,26.825 41.075,22.614 U6.31 ; v1(40.45,24.75) 40.475,24.775 41.075,24.775
  Bottom Layer w0.4: v1(40.45,24.75) 44.125,24.75 45.575,26.2 50.66,26.2 JP3.3
PD4: R8.2 U6.2 | length 65.2
  Top Layer w0.4: v1(21.825,26.875) 22.2,27.25 22.2,31.35 23.325,32.475 23.325,50.225 22.526,51.024 19.7,53.85 19.7,64.25 23.662,68.212 R8.2 ; v1(34.425,27.375) 34.425,24.495 U6.2
  Bottom Layer w0.4: v1(21.825,26.875) 22.175,26.525 33.575,26.525 v1(34.425,27.375)
PD5: R9.2 U6.9 | length 10.3
  Top Layer w0.4: R9.2 26.288,13.712 v1(26.425,13.575) ; v1(31.45,15.193) 32.523,15.193 U6.9
  Bottom Layer w0.4: v1(26.425,13.575) 28.043,15.193 v1(31.45,15.193)
PD6: U6.10 X4.1 | length 5.3
  Top Layer w0.4: X4.1 32.073,13.612 U6.10
PD7: JP5.1 U6.11 | length 16.3
  Top Layer w0.4: JP5.1 23.691,4.098 U6.11
PWRSTAT: Q1.3 R6.2 U6.22 | length 65.5
  Top Layer w0.4: U6.22 43.288,14.5 45.2,14.5 v1(45.875,15.175) 45.9,15.175 v1@45.9,15.1 ; v1(51.65,48.4) 50.025,46.775 50.025,34.9 55.625,29.3 55.625,22.25 53.875,20.5 v1(53.875,15) ; Q1.3@56.75,56.625 58.325,56.625 v1(58.388,56.687) R6.2
  Bottom Layer w0.4: v1(45.875,15.175) 46.05,15 v1(53.875,15) ; v1(51.65,48.4) 52.825,48.4 55.8,51.375 55.8,54.1 v1(58.388,56.687)
RI: U1.4 U6.28 | length 84.8
  Top Layer w0.4: v1@22.3,25.25 22.275,25.25 23,25.975 23,30.975 24.025,32 24.025,50.5 21.88,52.645 20.45,54.075 20.45,63.95 23.4,66.9 25.1,66.9 25.275,67.075 25.275,69.8 26.475,71 U1.4 ; U6.28 44.95,23.095 v1(44.95,27.175)
  Bottom Layer w0.4: v1(22.3,25.275) 23.2,25.275 23.8,25.875 43.65,25.875 v1(44.95,27.175)
RXD: R15.1 R22.1 U1.10 | length 62.2
  Top Layer w0.4: R15.1@24.831,64.15 23.25,64.15 22.2,63.1 22.2,54.425 25.5,51.125 25.5,31.3 24.5,30.3 24.5,27.05 25.5,26.05 25.5,25 v1(26.5,24) ; R22.1 36.788,24.812 v1(37.025,24.575)
  Top Layer w0.5: R15.1@24.831,64.15 R15.1 25.681,65 U1.10
  Bottom Layer w0.4: v1(26.5,24) 26.975,24.475 34.15,24.475 34.95,23.675 36.125,23.675 v1(37.025,24.575)
TXD: R21.1 U1.9 | length 67.2
  Top Layer w0.4: v1(23.925,24.475) 24.35,24.9 24.35,26.075 23.775,26.65 23.775,30.65 24.775,31.65 24.775,50.8 23.37,52.205 21.35,54.225 21.35,63.925 23.425,66 U1.9 ; v1(35.625,24.775) 35.45,24.95 35.45,28.856 R21.1
  Bottom Layer w0.4: v1(23.925,24.475) 24.625,25.175 35.225,25.175 v1(35.625,24.775)
VBAT: C5.2 C6.2 C7.2 C8.2 C9.1 C15.2 D1.2 D2.2 DS1.1 DS2.1 JP4.1 Q5.2 U1.55 U1.56 U1.57 U6.4 U6.6 U6.18 | length 166.5
  Top Layer w0.5: U6.18 41.025,12.238 41.025,8.219 C7.2 ; v1(48.65,17.475) 48.65,11.47 Q5.2
  Top Layer w0.6: U1.57 42.9,79.375 43.075,79.55 44.75,79.55 44.9,79.4 U1.55 ; U1.56 43.9,79.55 ; 53.975,66.675 v1@57.192,66.675 ; v1(53.975,79.025) 53.975,46.75 54.75,45.975 55.7,45.975 57.15,44.525 57.15,24.656 JP4.1 58.299,21.374 55.15,18.225 v2(55.15,17.5) ; DS1.1 57.192,68.595 DS2.1
  Top Layer w1: D2.2 D1.2@15.448,87.898 ; D1.2 16.547,88.9 44.675,88.9 C9.1@46.529,87.046 ; 44.2,79.325 44.2,79.675 46.529,82.004 C9.1@46.529,87.046 ; C9.1@46.575,87 C9.1@46.529,87.046
  Bottom Layer w0.6: C15.2 40.094,17.4 v2(41.675,17.4) ; v2@41.675,17.6 41.775,17.5 v2(55.15,17.5) ; C6.2 44.293,79.793 v2(44.925,80.425) 52.9,80.425 53.975,79.35 v1(53.975,79.025) ; C8.2 57.182,66.682 v1(57.182,66.66)
VDD_EXT: R15.2 U1.15 | length 3.5
  Top Layer w0.5: R15.2 26.506,60 U1.15
pads on no net: B1.0 U1.2 U1.3 U1.5 U1.6 U1.7 U1.8 U1.11 U1.12 U1.13 U1.14 U1.19 U1.20 U1.21 U1.22 U1.23 U1.24 U1.25 U1.27 U1.28 U1.34 U1.35 U1.36 U1.37 U1.38 U1.40 U1.41 U1.42 U1.43 U1.44 U1.47 U1.48 U1.49 U1.50 U1.51 U1.67 U1.68 U2.6 U6.23 U6.24 U6.25 U6.26 VD1.5

## Polygon pours and split planes (outlines as drawn)
GND on Top Layer (hatched 90Degree grid 0.1 track 0.3, remove dead copper): -1.637,90.973 -1.637,-0.75 61,-0.75 61,91.25 -1.7,91.25
VBAT on Top Layer (hatched 90Degree grid 0.1 track 0.3, remove dead copper): 38.325,23.675 32.275,17.625 32.1,17.45 38.35,11.2 38.475,11.075 38.6,10.95 38.8,10.95 45.175,17.325 45.275,17.425 38.675,24.025 38.275,23.625
GND on Bottom Layer (hatched 90Degree grid 0.1 track 0.3, remove dead copper): -1.375,-1.1 61.875,-1.1 61.875,91.25 -0.75,91.25 -0.75,-1.15

## Keep-outs
Keep-Out Layer:
  circle w0.254: c39.4,74 r1.591
  lines w0.254: 38.575,69.25 32.125,69.25 32.125,62.775 38.6,62.775 ; 38.65,62.825 38.65,69.3
  lines w0.3: 0,0 60,0 60,90 0,90 0,0

## Text inside footprints (layer, text, board x,y; h text height)
JP3: Top Overlay "3" at 52.408,28.964 h1 r90; Top Overlay "4" at 49.868,28.964 h1 r90; Top Overlay "2" at 49.868,22.36 h1 r90; Top Overlay "1" at 52.408,22.868 h1 r90
U4: Top Overlay "5" at 15.4,42.1 h1 r90; Top Overlay "1" at 15.4,35.55 h1 r90